# EAGLE board Schematic_EBook v22 (EAGLE 9.7.0)
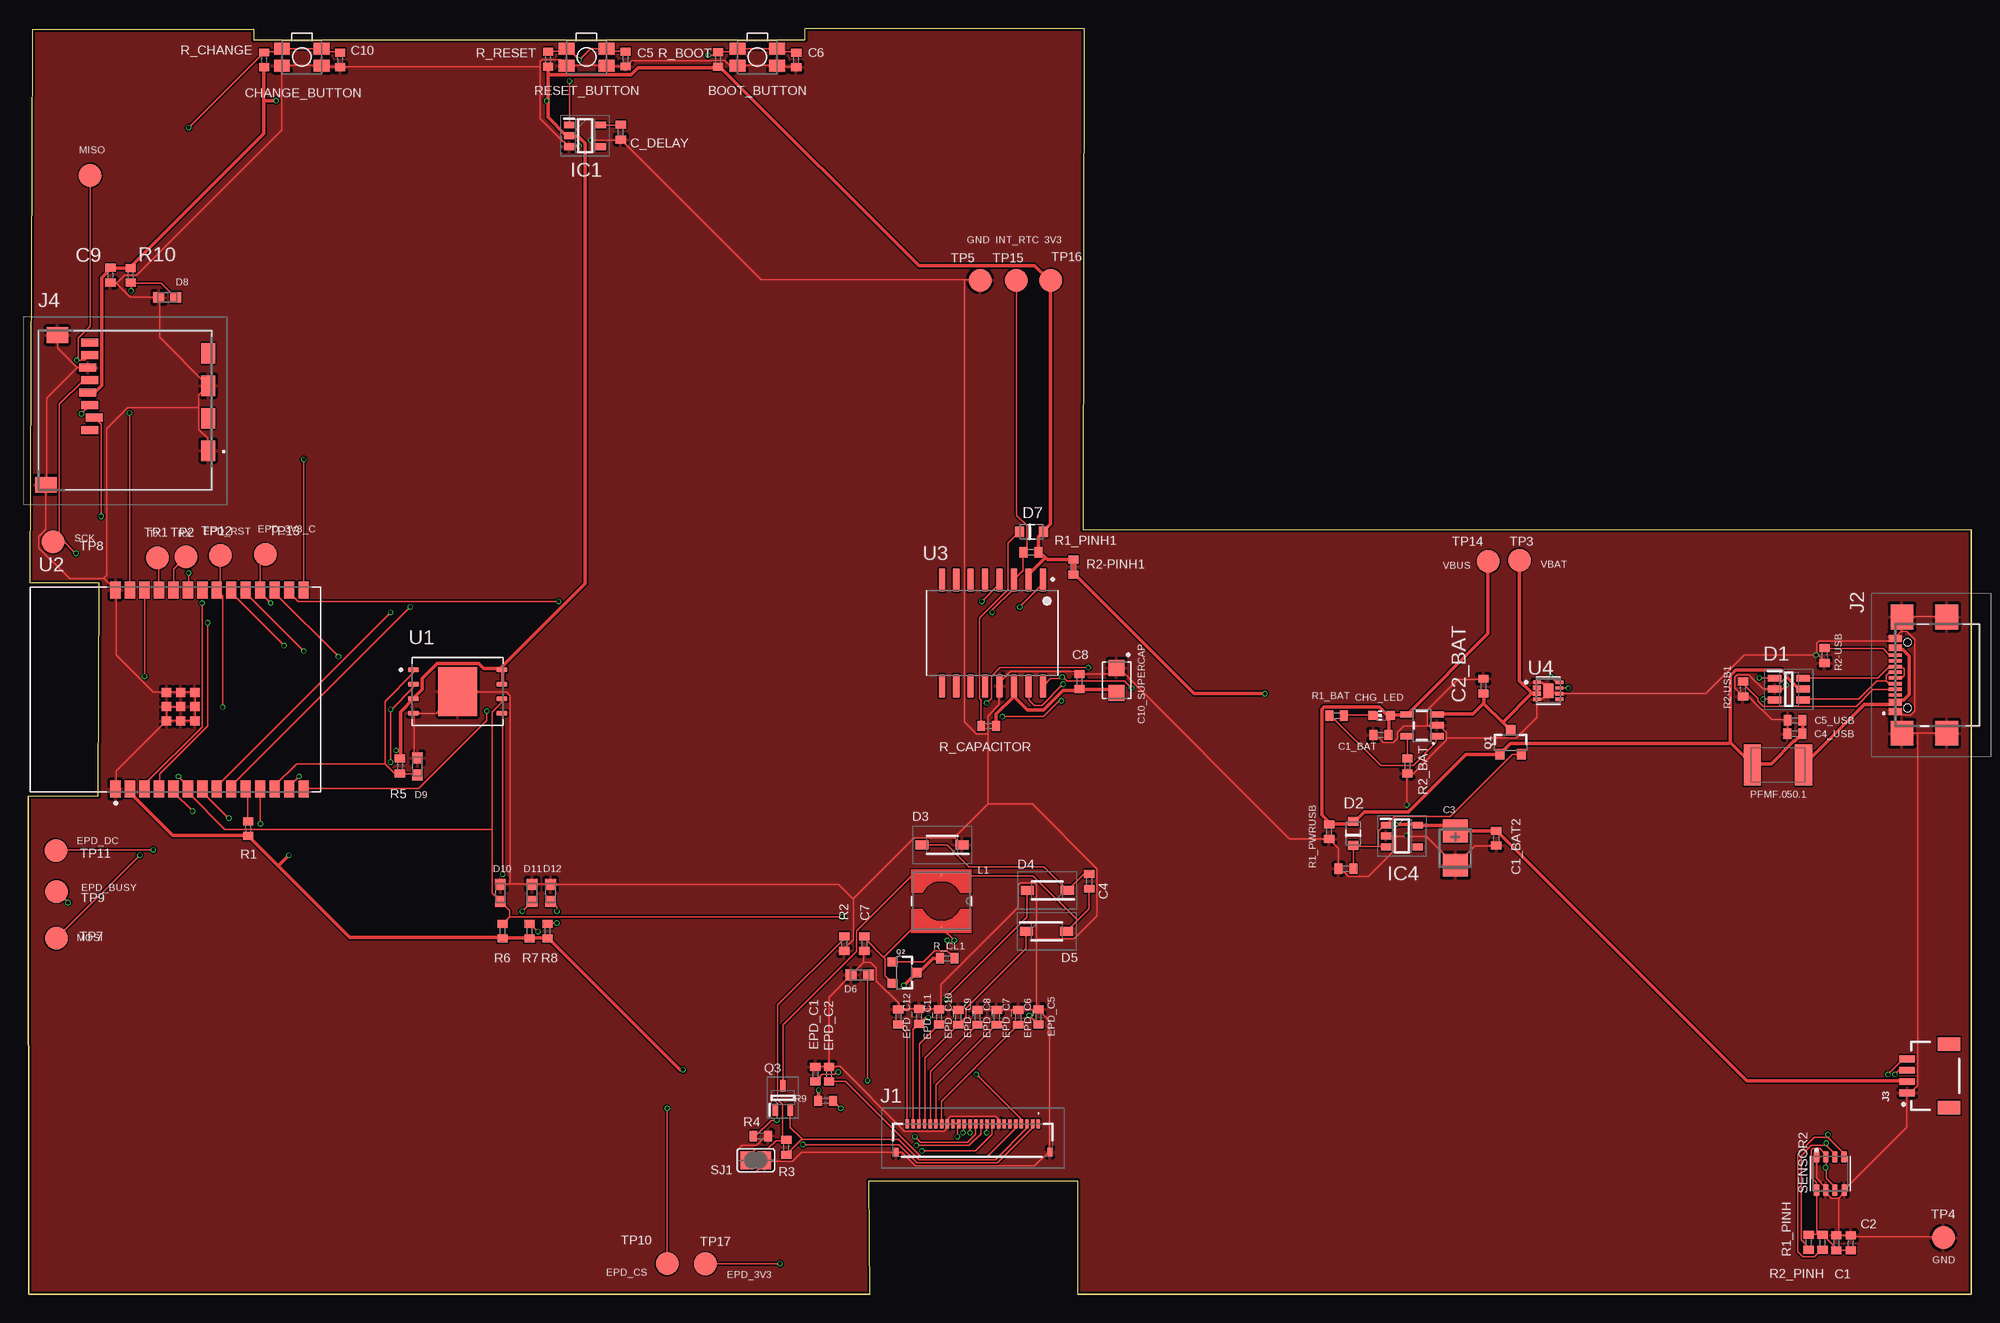
[diagram p0: board, top side]
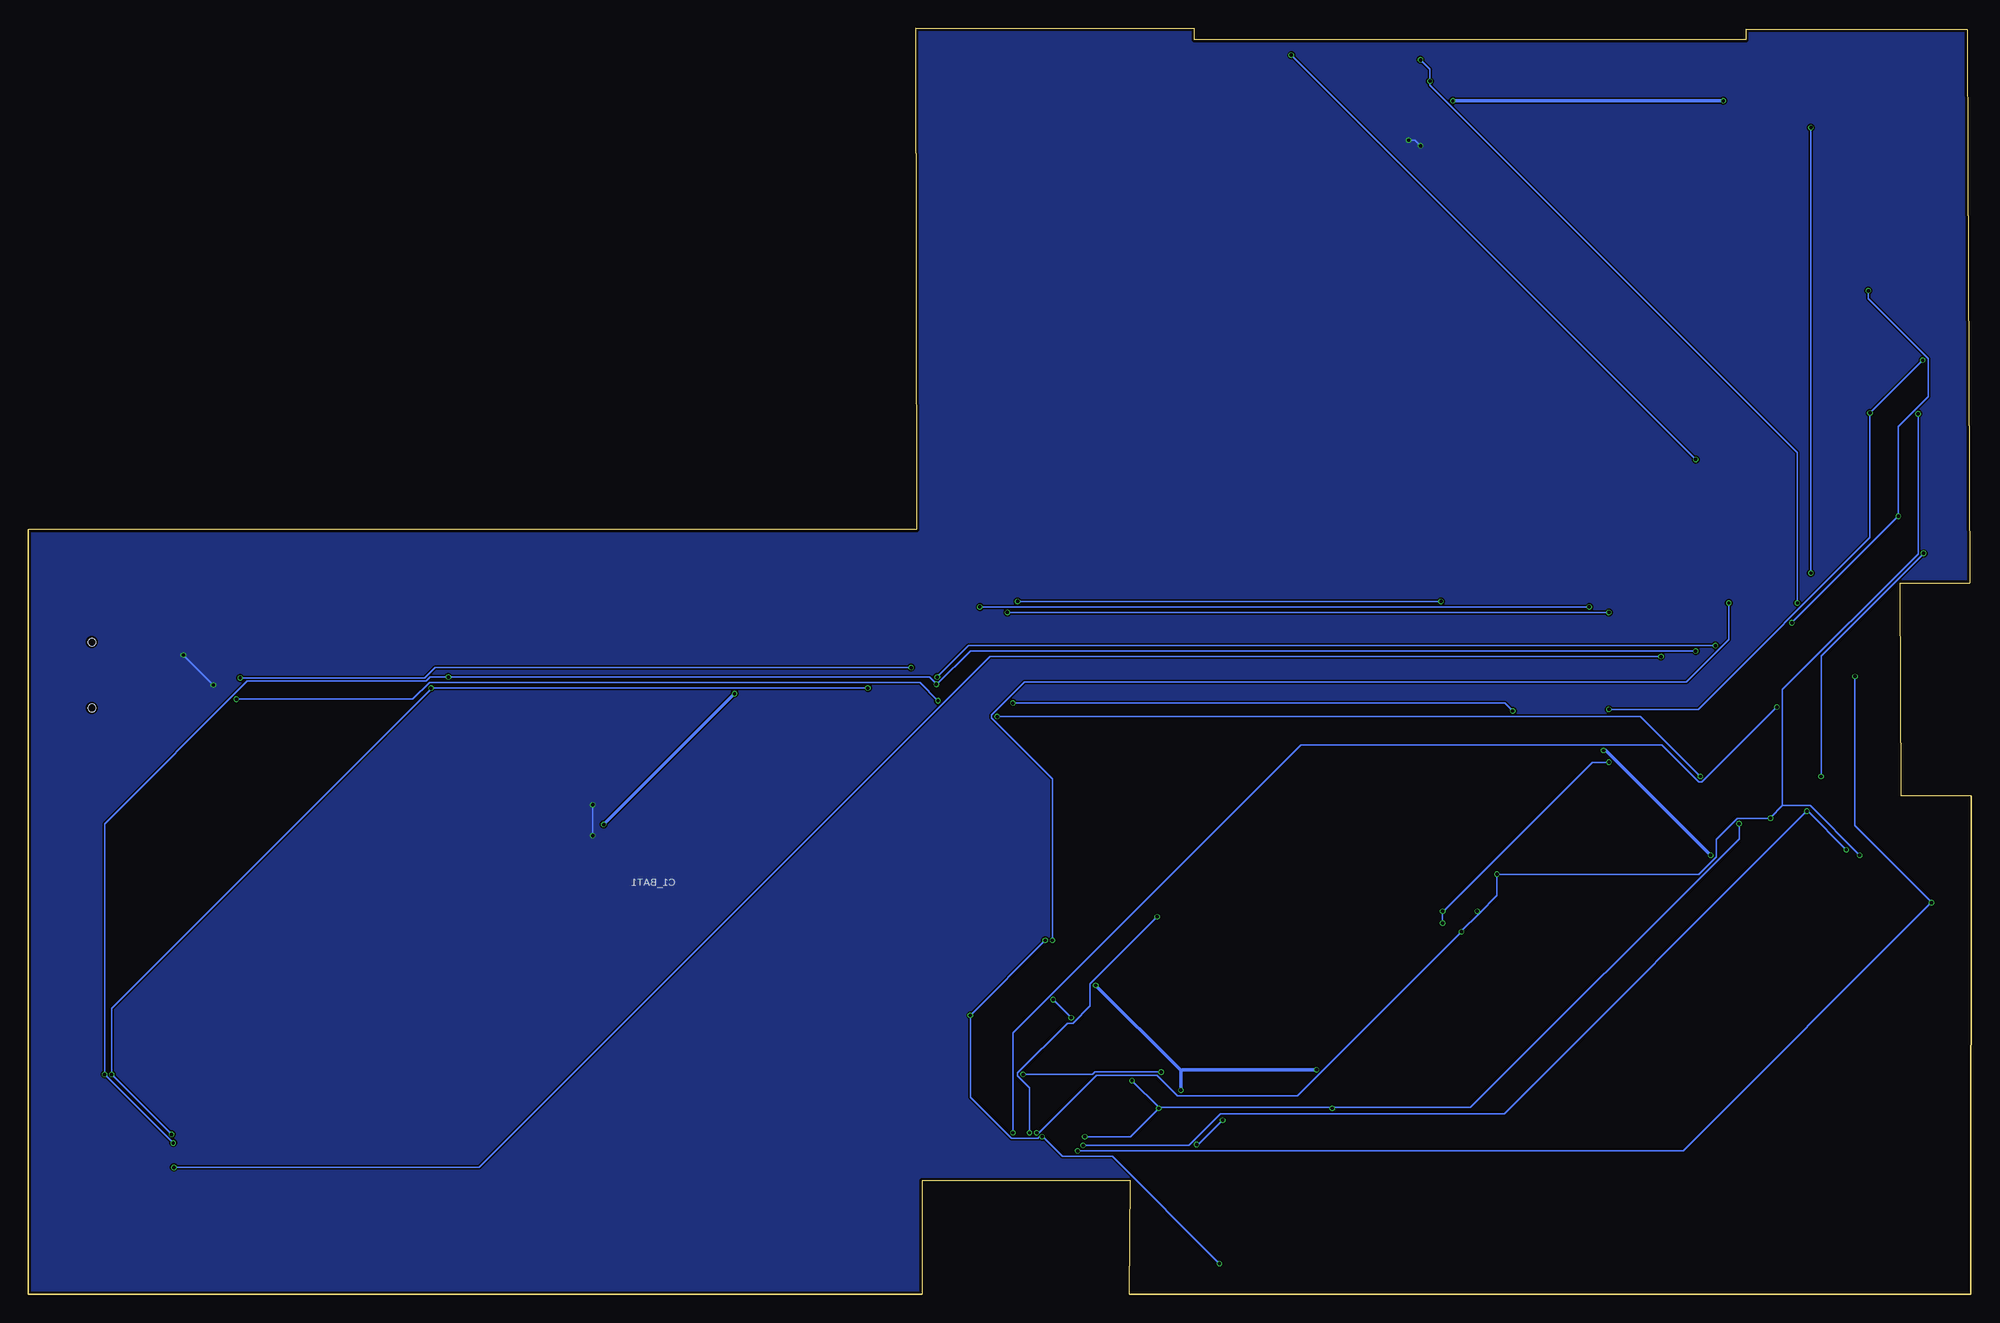
[diagram p1: board, bottom side, seen from below]

Size 170.61 x 111.2 mm. Coordinates in mm from the lower left corner, seen from the top.
Outline: 0.01,0 73.91,0
Outline: 92.11,0 170.61,0
Outline: 170.61,0 170.61,67.2
Outline: 92.71,111.2 68.21,111.17
Outline: 19.79,111.12 0.31,111.1
Outline: 0,43.8 0.01,0
Outline: 0.31,111.1 19.79,111.12
Outline: 68.21,111.17 92.71,111.2
Outline: 92.71,111.2 92.61,67.2 170.61,67.2
Outline: 170.61,67.2 170.61,0
Outline: 170.61,0 92.11,0
Outline: 73.91,0 0.01,0
Outline: 0.01,0 0,43.8
Outline: 73.91,0 73.81,10 92.01,10 92.11,10 92.11,0
Outline: 0,43.8 6.11,43.8 6.21,62.5 0.1,62.5 0.3,99.3 0.31,111.1
Outline: 19.79,111.12 19.79,110.2 68.21,110.2 68.21,111.17
Copper layers (1*16): Top 0.035mm / dielectric 1.6mm / Bottom 0.035mm
Design rules "jlcpcb-2layers.dru": minimum track width 0.15mm, minimum drill 0.3mm, track to track 5mil, track to pad 5mil, pad to pad 5mil, via to via 5mil, smd to smd 5mil, copper to edge 0.2mm, drill to drill 6mil, minimum pad ring 10mil, minimum via ring 3mil, stop-mask expansion 4mil, vias tented up to drill 0mil, thermal gap 10mil
Net classes: 2 Power: width 0.3 mm

## Footprints (pad centres in the part's own frame; a part is rotated, then mirrored left to right if it is on the bottom)
MYBUTTON = smd 1.4 x 1.05: 1 1.75,0.75; 2 -1.75,0.75; 3 -1.75,-0.75; 4 1.75,-0.75
EAGLE-LTSPICE_C0402 = smd 0.7 x 0.9: 1 -0.65,0; 2 0.65,0
RCL_CT3528 = smd 2 x 2.2: + -1.5,0; - 1.5,0
CAPCP3225X100N = smd 1.4 x 1.4: 1 -1.1,0; 2 1.1,0
ADAFRUIT_CHIP-LED0603 = smd 0.8 x 0.8: A 0,-0.75; C 0,0.75
SOT95P280X145-6N = smd 1.2 x 0.6: 1 -1.25,0.95; 2 -1.25,0; 3 -1.25,-0.95; 4 1.25,-0.95; 5 1.25,0; 6 1.25,0.95
ESP32_WROVER_AVX---SD0805S020S1R0_AVX_SD0805S020S1R0_0 = smd 0.8 x 0.9: 1 -1.05,0; 2 1.05,0
SOD3716X135N = smd 1.15 x 0.8: 1 -1.75,0; 2 1.75,0
DIOC1608X36N = smd 0.97 x 0.94: 1 -0.75,0; 2 0.75,0
SOT95P280X125-5N = smd 0.9 x 0.6: 1 -1.4,0.95; 2 -1.4,0; 3 -1.4,-0.95; 4 1.4,-0.95; 5 1.4,0.95
SOT95P280X120-5N = smd 0.9 x 0.6: 1 -1.4,0.95; 2 -1.4,0; 3 -1.4,-0.95; 4 1.4,-0.95; 5 1.4,0.95
FH34SRJ24S05SH99 = smd 0.3 x 0.8: 1 5.75,1.45; 2 5.25,1.45; 3 4.75,1.45; 4 4.25,1.45; 5 3.75,1.45; 6 3.25,1.45; 7 2.75,1.45; 8 2.25,1.45; 9 1.75,1.45; 10 1.25,1.45; 11 0.75,1.45; 12 0.25,1.45; 13 -0.25,1.45; 14 -0.75,1.45; 15 -1.25,1.45; 16 -1.75,1.45; 17 -2.25,1.45; 18 -2.75,1.45; 19 -3.25,1.45; 20 -3.75,1.45; 21 -4.25,1.45; 22 -4.75,1.45; 23 -5.25,1.45; 24 -5.75,1.45 | smd 0.4 x 0.8: MP1 6.75,-1.05; MP2 -6.75,-1.05
SAMACSYS_PARTS_USB4110GFA = smd 0.3 x 1.15: A1 -3.35,3.678; A4 -2.55,3.678; A5 -1.25,3.678; A6 -0.25,3.678; A7 0.25,3.678; A8 1.25,3.678; A9 2.55,3.678; A12 3.35,3.678; B1 3.05,3.678; B4 2.25,3.678; B5 1.75,3.678; B6 0.75,3.678; B7 -0.75,3.678; B8 -1.75,3.678; B9 -2.25,3.678; B12 -3.05,3.678 | smd 2.18 x 2: MP1 -5.11,-0.827; MP2 5.11,-0.827; MP3 -5.11,3.103; MP4 5.11,3.103 | hole 0.65: -2.89,2.603; 2.89,2.603
JST04_1MM_RA = smd 0.6 x 1.35: 1 -1.5,0; 2 -0.5,0; 3 0.5,0; 4 1.5,0 | smd 1.2 x 2: NC1 2.8,-3.675; NC2 -2.8,-3.675
112ATAARR03ATTEND = smd 1.8 x 1.2: G1 10.6,10.4; G2 4.9,10.4; S1 7.75,10.4; S2 2.05,10.4 | smd 1.4 x 1.9: G3 13.6,-3.85; G4 0.45,-2.85 | smd 0.7 x 1.5: P1 8.8,0; P2 7.7,0.4; P3 6.6,0; P4 5.5,-0.2; P5 4.4,0; P6 3.3,-0.2; P7 2.2,0; P8 1.1,0
IND_4828-WE-TPC_WRE = smd 0.127 x 0.127: 1 -2.286,0; 2 2.286,0
ESP32_WROVER_SPARKFUN-IC-POWER_SOT23-5 = smd 0.55 x 1.2: 1 -0.95,-1.3; 2 0,-1.3; 3 0.95,-1.3; 4 0.95,1.3; 5 -0.95,1.3
ESP32C6_VARISTOR_CT/CN1812 = smd 1.5 x 3.6: 1 -2.25,0; 2 2.25,0
ESP32_WROVER_SPARKFUN-DISCRETESEMI_SOT23-3 = smd 0.8 x 0.9: 1 -0.95,-1; 2 0.95,-1; 3 0,1.1
SOT65P210X110-3N = smd 1.05 x 0.5: 1 -1.05,0.65; 2 -1.05,-0.65; 3 1.05,0
ESP32_WROVER_EAGLE-LTSPICE_R0402 = smd 0.7 x 0.9: 1 -0.65,0; 2 0.65,0
ESP32_WROVER_BME680_PSON80P300X300X100-8N = smd 1.016 x 0.5: 1 1.458,1.2; 2 1.458,0.4; 3 1.458,-0.4; 4 1.458,-1.2; 5 -1.458,-1.22; 6 -1.458,-0.4; 7 -1.458,0.4; 8 -1.458,1.2
SJ = smd 1.168 x 1.6: 1 -0.762,0; 2 0.762,0
TP20R = smd 2 x 2: TP 0,0
SON127P600X800X80-9N = smd 0.94 x 0.44: 1 -3.895,1.905; 2 -3.895,0.635; 3 -3.895,-0.635; 4 -3.895,-1.905; 5 3.895,-1.905; 6 3.895,-0.635; 7 3.895,0.635; 8 3.895,1.905 | smd 3.4 x 4.3: 9 0,0
XCVR_ESP32-C6-WROOM-1-N8 = smd 1.5 x 0.9: 1 -8.75,5.26; 2 -8.75,3.99; 3 -8.75,2.72; 4 -8.75,1.45; 5 -8.75,0.18; 6 -8.75,-1.09; 7 -8.75,-2.36; 8 -8.75,-3.63; 9 -8.75,-4.9; 10 -8.75,-6.17; 11 -8.75,-7.44; 12 -8.75,-8.71; 13 -8.75,-9.98; 14 -8.75,-11.25; 15 8.75,-11.25; 16 8.75,-9.98; 17 8.75,-8.71; 18 8.75,-7.44; 19 8.75,-6.17; 20 8.75,-4.9; 21 8.75,-3.63; 22 8.75,-2.36; 23 8.75,-1.09; 24 8.75,0.18; 25 8.75,1.45; 26 8.75,2.72; 27 8.75,3.99; 28 8.75,5.26 | smd 0.8 x 0.8: 29_1 -2.755,0.79; 29_2 -1.505,0.79; 29_3 -0.255,0.79; 29_4 -2.755,-0.46; 29_5 -1.505,-0.46; 29_6 -0.255,-0.46; 29_7 -2.755,-1.71; 29_8 -1.505,-1.71; 29_9 -0.255,-1.71
SOIC127P1032X265-16N = smd 2.05 x 0.59: 1 -4.655,4.445; 2 -4.655,3.175; 3 -4.655,1.905; 4 -4.655,0.635; 5 -4.655,-0.635; 6 -4.655,-1.905; 7 -4.655,-3.175; 8 -4.655,-4.445; 9 4.655,-4.445; 10 4.655,-3.175; 11 4.655,-1.905; 12 4.655,-0.635; 13 4.655,0.635; 14 4.655,1.905; 15 4.655,3.175; 16 4.655,4.445
SON50P200X200X80-9N = smd 0.76 x 0.27: 1 -0.985,0.75; 4 -0.985,-0.75; 5 0.985,-0.75; 6 0.985,-0.25; 7 0.985,0.25; 8 0.985,0.75 | smd 0.813 x 0.406: 2 -0.985,0.25; 3 -0.985,-0.25 | smd 0.9 x 1.3: 9 0,0

## Placement (x,y rotation side)
BOOT_BUTTON  BUTTON_CUSYOMV1  [MYBUTTON]  64.01,108.69 180 top
C1  100nF  [EAGLE-LTSPICE_C0402]  158.77,4.53 90 top
C1_BAT  4.7uF  [EAGLE-LTSPICE_C0402]  118.77,49.15 180 top
C1_BAT1  4.7uF  [EAGLE-LTSPICE_C0402]  115.71,37.4 180 top
C1_BAT2  4.7uF  [EAGLE-LTSPICE_C0402]  128.9,40.07 270 top
C2  100nF  [EAGLE-LTSPICE_C0402]  160.05,4.53 90 top
C2_BAT  4.7uF  [EAGLE-LTSPICE_C0402]  127.79,53.43 90 top
C3  100uF TANT  [RCL_CT3528]  125.32,39.2 270 top
C4  4.7uF/25V  [EAGLE-LTSPICE_C0402]  93.16,36.29 270 top
C4_USB  100nF  [EAGLE-LTSPICE_C0402]  155.12,49.25 180 top
C5  1uF  [EAGLE-LTSPICE_C0402]  52.44,108.51 270 top
C5_USB  4.7uF  [EAGLE-LTSPICE_C0402]  155.15,50.43 180 top
C6  100nF  [EAGLE-LTSPICE_C0402]  67.43,108.43 270 top
C7  10uF  [EAGLE-LTSPICE_C0402]  73.41,30.81 270 top
C8  100nF  [EAGLE-LTSPICE_C0402]  92.31,53.83 90 top
C9  100nF  [EAGLE-LTSPICE_C0402]  7.19,89.52 270 top
C10  100nF  [EAGLE-LTSPICE_C0402]  27.37,108.43 270 top
C10_SUPERCAP  CPH3225A  [CAPCP3225X100N]  95.57,53.94 270 top
C_DELAY  100nF  [EAGLE-LTSPICE_C0402]  52.02,102.09 270 top
CHANGE_BUTTON  BUTTON_CUSYOMV1  [MYBUTTON]  24.01,108.69 180 top
CHG_LED  [ADAFRUIT_CHIP-LED0603]  118.85,50.85 90 top
D1  USBLC6-2SC6Y  [SOT95P280X145-6N]  154.61,53.17 0 top
D2  ESP32_WROVER_AVX---SD0805S020S1R0_AVX_SD0805S020S1R0_0_0AVX_SD0805S020S1R0_0_0  [ESP32_WROVER_AVX---SD0805S020S1R0_AVX_SD0805S020S1R0_0]  116.35,40.48 90 top
D3  MBR0530  [SOD3716X135N]  80.24,39.48 180 top
D4  MBR0530  [SOD3716X135N]  89.48,35.48 180 top
D5  MBR0530  [SOD3716X135N]  89.42,31.88 0 top
D6  PGB1010603MR  [DIOC1608X36N]  73.01,28.07 0 top
D7  ESP32_WROVER_AVX---SD0805S020S1R0_AVX_SD0805S020S1R0_0_0AVX_SD0805S020S1R0_0_0  [ESP32_WROVER_AVX---SD0805S020S1R0_AVX_SD0805S020S1R0_0]  88.1,66.98 0 top
D8  PGB1010603MR  [DIOC1608X36N]  12.19,87.57 0 top
D9  PGB1010603MR  [DIOC1608X36N]  34.17,46.37 270 top
D10  PGB1010603MR  [DIOC1608X36N]  41.45,35.27 270 top
D11  PGB1010603MR  [DIOC1608X36N]  44.23,35.27 270 top
D12  PGB1010603MR  [DIOC1608X36N]  45.86,35.28 270 top
EPD_C1  1uF/50V  [EAGLE-LTSPICE_C0402]  69.11,19.35 90 top
EPD_C2  1uF/50V  [EAGLE-LTSPICE_C0402]  70.32,19.35 90 top
EPD_C5  0.1uF/50V  [EAGLE-LTSPICE_C0402]  88.7,24.39 90 top
EPD_C6  1uF/50V  [EAGLE-LTSPICE_C0402]  86.93,24.35 90 top
EPD_C7  1uF/50V  [EAGLE-LTSPICE_C0402]  85.04,24.35 90 top
EPD_C8  1uF/50V  [EAGLE-LTSPICE_C0402]  83.35,24.35 90 top
EPD_C9  1uF/50V  [EAGLE-LTSPICE_C0402]  81.66,24.35 90 top
EPD_C10  1uF/50V  [EAGLE-LTSPICE_C0402]  79.96,24.39 90 top
EPD_C11  1uF/50V  [EAGLE-LTSPICE_C0402]  78.22,24.42 90 top
EPD_C12  1uF/50V  [EAGLE-LTSPICE_C0402]  76.4,24.39 90 top
IC1  BD5229G-TR  [SOT95P280X125-5N]  48.88,101.77 0 top
IC4  XC6220A331MR-G  [SOT95P280X120-5N]  120.62,40.27 0 top
J1  FH34SRJ-24S-0.5SH_99_  [FH34SRJ24S05SH99]  82.95,13.54 0 top
J2  SAMACSYS_PARTS_USB4110-GF-A  [SAMACSYS_PARTS_USB4110GFA]  167.65,54.4 90 top
J3  QWIIC_RIGHT_ANGLE  [JST04_1MM_RA]  165,19.2 90 top
J4  112A-TAAR-R03_ATTEND  [112ATAARR03ATTEND]  5.39,84.71 270 top
L1  68uH  [IND_4828-WE-TPC_WRE]  80.18,34.55 270 top
MCP73831  ESP32_WROVER_SPARKFUN-IC-POWER_MCP73831  [ESP32_WROVER_SPARKFUN-IC-POWER_SOT23-5]  122.39,49.99 90 top
PFMF.050.1  ESP32C6_VARISTORCN1812  [ESP32C6_VARISTOR_CT/CN1812]  153.65,46.5 180 top
Q1  20V/4.2A/52mΩ/1.4W  [ESP32_WROVER_SPARKFUN-DISCRETESEMI_SOT23-3]  130.17,48.46 0 top
Q2  20V/4.2A/52mΩ/1.4W  [ESP32_WROVER_SPARKFUN-DISCRETESEMI_SOT23-3]  76.89,28.26 270 top
Q3  SI1308EDL-T1-GE3  [SOT65P210X110-3N]  66.25,17.28 90 top
R1  10K  [ESP32_WROVER_EAGLE-LTSPICE_R0402]  19.29,40.91 90 top
R1_BAT  200  [ESP32_WROVER_EAGLE-LTSPICE_R0402]  114.9,50.83 0 top
R1_PINH  10K  [ESP32_WROVER_EAGLE-LTSPICE_R0402]  156.34,4.57 90 top
R1_PINH1  10K  [ESP32_WROVER_EAGLE-LTSPICE_R0402]  88.05,65.19 0 top
R1_PWRUSB  100K  [ESP32_WROVER_EAGLE-LTSPICE_R0402]  114.23,40.64 90 top
R2  2.2  [ESP32_WROVER_EAGLE-LTSPICE_R0402]  71.65,30.81 90 top
R2-PINH1  10K  [ESP32_WROVER_EAGLE-LTSPICE_R0402]  91.78,63.89 90 top
R2-USB  5k1  [ESP32_WROVER_EAGLE-LTSPICE_R0402]  157.75,56.13 270 top
R2-USB1  5k1  [ESP32_WROVER_EAGLE-LTSPICE_R0402]  150.58,53.17 90 top
R2_BAT  2K  [ESP32_WROVER_EAGLE-LTSPICE_R0402]  121.11,46.42 90 top
R2_PINH  10K  [ESP32_WROVER_EAGLE-LTSPICE_R0402]  157.56,4.57 90 top
R3  0.47  [ESP32_WROVER_EAGLE-LTSPICE_R0402]  66.55,12.92 90 top
R4  10K  [ESP32_WROVER_EAGLE-LTSPICE_R0402]  64.31,13.91 0 top
R5  10K  [ESP32_WROVER_EAGLE-LTSPICE_R0402]  32.63,46.41 90 top
R6  10K  [ESP32_WROVER_EAGLE-LTSPICE_R0402]  41.65,31.91 270 top
R7  10K  [ESP32_WROVER_EAGLE-LTSPICE_R0402]  44.01,31.91 270 top
R8  10K  [ESP32_WROVER_EAGLE-LTSPICE_R0402]  45.59,31.91 270 top
R9  10K  [ESP32_WROVER_EAGLE-LTSPICE_R0402]  70.01,17.01 180 top
R10  10K  [ESP32_WROVER_EAGLE-LTSPICE_R0402]  8.97,89.51 90 top
R_BOOT  10K  [ESP32_WROVER_EAGLE-LTSPICE_R0402]  60.57,108.47 90 top
R_CAPACITOR  15  [ESP32_WROVER_EAGLE-LTSPICE_R0402]  84.33,49.94 180 top
R_CHANGE  10K  [ESP32_WROVER_EAGLE-LTSPICE_R0402]  20.7,108.44 90 top
R_CL1  10K  [ESP32_WROVER_EAGLE-LTSPICE_R0402]  80.69,29.53 0 top
R_RESET  10K  [ESP32_WROVER_EAGLE-LTSPICE_R0402]  45.64,108.49 90 top
RESET_BUTTON  BUTTON_CUSYOMV1  [MYBUTTON]  49.01,108.69 180 top
SENSOR2  ESP32_WROVER_BME680_BME680  [ESP32_WROVER_BME680_PSON80P300X300X100-8N]  158.25,10.62 90 top
SJ1  [SJ]  63.87,11.79 180 top
TP1  TPTP20R  [TP20R]  11.32,64.69 0 top
TP2  TPTP20R  [TP20R]  13.85,64.78 0 top
TP3  TPTP20R  [TP20R]  130.96,64.49 0 top
TP4  TPTP20R  [TP20R]  168.18,4.99 0 top
TP5  TPTP20R  [TP20R]  83.57,89.09 0 top
TP6  TPTP20R  [TP20R]  5.42,98.29 0 top
TP7  TPTP20R  [TP20R]  2.44,31.29 0 top
TP8  TPTP20R  [TP20R]  2.16,66.09 0 top
TP9  TPTP20R  [TP20R]  2.48,35.39 0 top
TP10  TPTP20R  [TP20R]  56.1,2.71 0 top
TP11  TPTP20R  [TP20R]  2.4,38.99 0 top
TP12  TPTP20R  [TP20R]  16.85,64.91 0 top
TP13  TPTP20R  [TP20R]  20.8,65.01 0 top
TP14  TPTP20R  [TP20R]  128.2,64.39 0 top
TP15  TPTP20R  [TP20R]  86.75,89.09 0 top
TP16  TPTP20R  [TP20R]  89.8,89.09 0 top
TP17  TPTP20R  [TP20R]  59.45,2.69 0 top
U1  W25Q512JVEIQ  [SON127P600X800X80-9N]  37.7,52.96 0 top
U2  ESP32-C6-WROOM-1-N8  [XCVR_ESP32-C6-WROOM-1-N8]  12.91,53.14 90 top
U3  DS3231SN#  [SOIC127P1032X265-16N]  84.66,58.1 270 top
U4  MAX17048G+T10  [SON50P200X200X80-9N]  133.48,53.02 0 top

## Library data of the parts
BOOT_BUTTON CHANGE_BUTTON CHG_LED PFMF.050.1 RESET_BUTTON SJ1 TP1-TP17 = DeskAssistant v19 v1
C1 C1_BAT C1_BAT1 C1_BAT2 C2 C2_BAT C4 C4_USB C5 C5_USB C6-C10 C_DELAY EPD_C1 EPD_C2 EPD_C5-EPD_C12 = DeskAssistant v19 v1; SPICEMODEL: NONE; SPICEPREFIX: C
C3 = DeskAssistant v19 v1; SPICEPREFIX: C
C10_SUPERCAP = DeskAssistant v19 v1; AVAILABILITY: Not in stock; CHECK_PRICES: https://www.snapeda.com/parts/CPH3225A/Seiko+Instruments/view-part/?ref=eda; DESCRIPTION: 11 mF (EDLC) Supercapacitor 3.3 V 1210 (3225 Metric) - -; MF: Seiko Instruments; MP: CPH3225A; PACKAGE: 1210 Seiko; PRICE: None; PURCHASE-URL: https://www.snapeda.com/api/url_track_click_mouser/?unipart_id=562593&manufacturer=Seiko Instruments&part_name=CPH3225A&search_term=None; SNAPEDA_LINK: https://www.snapeda.com/parts/CPH3225A/Seiko+Instruments/view-part/?ref=snap
D1 = DeskAssistant v19 v1; AVAILABILITY: In Stock; CHECK_PRICES: https://www.snapeda.com/parts/USBLC6-2SC6Y/STMicroelectronics/view-part/?ref=eda; DESCRIPTION: 17V Clamp 5A (8/20µs) Ipp Tvs Diode Surface Mount SOT-23-6; MF: STMicroelectronics; MP: USBLC6-2SC6Y; PACKAGE: SOT-23-6 STMicroelectronics; PRICE: None; SNAPEDA_LINK: https://www.snapeda.com/parts/USBLC6-2SC6Y/STMicroelectronics/view-part/?ref=snap
D2 D7 = DeskAssistant v19 v1; CENTROID_NOT_SPECIFIED: No; DATASHEET: http://datasheets.avx.com/schottky.pdf; DIGIKEY_DESCRIPTION: DIODE SCHOTTKY 20V 1A 0805; DIGIKEY_PART_NUMBER: 478-7800-1-ND; LEAD_FREE: yes; MF: AVX; MOUSER_PART_NUMBER: 581-SD0805S020S1R0; PACKAGE: 0805 (2012 metric); PREFIX: D; ROHS: yes; TEMPERATURE_RANGE_HIGH: +125°C; TEMPERATURE_RANGE_LOW: -55°C
D3-D5 = DeskAssistant v19 v1; AVAILABILITY: In Stock; CHECK_PRICES: https://www.snapeda.com/parts/MBR0530/Onsemi/view-part/?ref=eda; DESCRIPTION: Diode Schottky 30 V 500mA Surface Mount SOD-123; MF: ON Semiconductor; MP: MBR0530; PACKAGE: SOD-123-2 ON Semiconductor; PRICE: None; PURCHASE-URL: https://www.snapeda.com/api/url_track_click_mouser/?unipart_id=179458&manufacturer=ON Semiconductor&part_name=MBR0530&search_term=None; SNAPEDA_LINK: https://www.snapeda.com/parts/MBR0530/Onsemi/view-part/?ref=snap
D6 D8-D12 = DeskAssistant v19 v1; AVAILABILITY: In Stock; CHECK_PRICES: https://www.snapeda.com/parts/PGB1010603MR/Littelfuse/view-part/?ref=eda; DESCRIPTION: 150V (Typ) Clamp - Ipp Tvs Diode Surface Mount 0603 (1608 Metric); MF: Littelfuse Inc.; MP: PGB1010603MR; PACKAGE: 0603 Littelfuse Inc.; PRICE: None; PURCHASE-URL: https://www.snapeda.com/api/url_track_click_mouser/?unipart_id=5659453&manufacturer=Littelfuse Inc.&part_name=PGB1010603MR&search_term=None; SNAPEDA_LINK: https://www.snapeda.com/parts/PGB1010603MR/Littelfuse/view-part/?ref=snap
IC1 = DeskAssistant v19 v1; DESCRIPTION: Voltage Detector with Adjustable Delay Time: CMOS processes are utilized to develop high precision, low current consumption CMOS reset ICs that allow arbitrary setting of the delay time. The extensive lineup includes both Nch Open Drain and CMOS output types in a wide range of detection voltages (from 2.3V to 6.0V, in 0.1V steps), enabling selection of the ideal solution based on customer requirements. In addition, the entire series is of course both lead-free and RoHS-compliant.; HEIGHT: 1.25mm; MANUFACTURER_NAME: ROHM Semiconductor; MANUFACTURER_PART_NUMBER: BD5229G-TR; MOUSER_PART_NUMBER: 755-BD5229G-TR; MOUSER_PRICE-STOCK: https://www.mouser.co.uk/ProductDetail/ROHM-Semiconductor/BD5229G-TR?qs=4kLU8WoGk0vvnhrrYwdszw%3D%3D
IC4 = DeskAssistant v19 v1; DESCRIPTION: LDO Voltage Regulators; HEIGHT: 1.2mm; MANUFACTURER_NAME: Torex; MANUFACTURER_PART_NUMBER: XC6220A331MR-G; MOUSER_PART_NUMBER: 865-XC6220A331MR-G; MOUSER_PRICE-STOCK: https://www.mouser.co.uk/ProductDetail/Torex-Semiconductor/XC6220A331MR-G?qs=AsjdqWjXhJ8ZSWznL1J0gg%3D%3D
J1 = DeskAssistant v19 v1; DESCRIPTION: 24 Position FFC, FPC Connector Contacts, Top and Bottom 0.020" (0.50mm) Surface Mount, Right Angle; HEIGHT: 1.1mm; MANUFACTURER_NAME: Hirose; MANUFACTURER_PART_NUMBER: FH34SRJ-24S-0.5SH(99); MOUSER_PART_NUMBER: 798-FH34SRJ24S05SH99; MOUSER_PRICE-STOCK: https://www.mouser.co.uk/ProductDetail/Hirose-Connector/FH34SRJ-24S-0.5SH99?qs=vcbW%252B4%252BSTIpKBl5ap9J8Fw%3D%3D
J2 = DeskAssistant v19 v1; DESCRIPTION: CONN USB 2.0 TYPE-C R/A SMT; HEIGHT: 3.26mm; MANUFACTURER_NAME: GCT (GLOBAL CONNECTOR TECHNOLOGY); MANUFACTURER_PART_NUMBER: USB4110-GF-A; MOUSER_PART_NUMBER: 640-USB4110-GF-A; MOUSER_PRICE-STOCK: https://www.mouser.co.uk/ProductDetail/GCT/USB4110-GF-A?qs=KUoIvG%2F9IlYiZvIXQjyJeA%3D%3D
J3 = DeskAssistant v19 v1; PROD_ID: CONN-13694
J4 = DeskAssistant v19 v1; DESCRIPTION: Micro SD Card Socket, Push-Push Type, Top Mount, SMT, H=1.83mm, 10u; HEIGHT: 1.9mm; MANUFACTURER_NAME: ATTEND; MANUFACTURER_PART_NUMBER: 112A-TAAR-R03 ATTEND
L1 = DeskAssistant v19 v1; COPYRIGHT: Copyright (C) 2024 Ultra Librarian. All rights reserved.; MANUFACTURER_PART_NUMBER: 744043680; MFR_NAME: Wurth Electronics
MCP73831 = DeskAssistant v19 v1; PROD_ID: IC-09995
Q1 Q2 = DeskAssistant v19 v1; PROD_ID: TRAN-14388
Q3 = DeskAssistant v19 v1; AVAILABILITY: In Stock; CHECK_PRICES: https://www.snapeda.com/parts/SI1308EDL-T1-GE3/Vishay+Siliconix/view-part/?ref=eda; DESCRIPTION: Si1308EDL-T1-GE3 N-channel MOSFET Transistor, 1.5 A, 30 V, 3-Pin SC-70 | Siliconix / Vishay SI1308EDL-T1-GE3; MF: Vishay Siliconix; MP: SI1308EDL-T1-GE3; PACKAGE: SOT-323 Vishay Semiconductor; PRICE: None; PURCHASE-URL: https://www.snapeda.com/api/url_track_click_mouser/?unipart_id=274603&manufacturer=Vishay Siliconix&part_name=SI1308EDL-T1-GE3&search_term=None; SNAPEDA_LINK: https://www.snapeda.com/parts/SI1308EDL-T1-GE3/Vishay+Siliconix/view-part/?ref=snap
R1 R1_BAT R1_PINH R1_PINH1 R1_PWRUSB R2 R2-PINH1 R2-USB R2-USB1 R2_BAT R2_PINH R3-R10 R_BOOT R_CAPACITOR R_CHANGE R_CL1 R_RESET = DeskAssistant v19 v1; SPICEMODEL: NONE; SPICEPREFIX: R
SENSOR2 = DeskAssistant v19 v1; AVAILABILITY: Unavailable; DESCRIPTION: Integrated Environmental Unit; MF: Bosch Sensortec; MP: BME680; PACKAGE: LGA-8 Bosch Tools; PRICE: None
U1 = DeskAssistant v19 v1; AVAILABILITY: In Stock; CHECK_PRICES: https://www.snapeda.com/parts/W25Q512JVEIQ/Winbond+Electronics/view-part/?ref=eda; DESCRIPTION: FLASH - NOR Memory IC 512Mb (64M x 8) SPI - Quad I/O 133 MHz 8-WSON (8x6); MF: Winbond Electronics; MP: W25Q512JVEIQ; PACKAGE: Package; PRICE: None; SNAPEDA_LINK: https://www.snapeda.com/parts/W25Q512JVEIQ/Winbond+Electronics/view-part/?ref=snap
U2 = DeskAssistant v19 v1; AVAILABILITY: In Stock; CHECK_PRICES: https://www.snapeda.com/parts/ESP32-C6-WROOM-1-N8/Espressif+Systems/view-part/?ref=eda; DESCRIPTION: Multiprotocol Modules ESP32-C6 module, Wi-Fi 6 in 2.4 GHz band, Bluetooth 5, Zigbee 3.0 and Thread. ESP34-WROOM Compatible - ENGINEERING SAMPLE; MF: Espressif Systems; MP: ESP32-C6-WROOM-1-N8; PACKAGE: None; PRICE: None; SNAPEDA_LINK: https://www.snapeda.com/parts/ESP32-C6-WROOM-1-N8/Espressif+Systems/view-part/?ref=snap
U3 = DeskAssistant v19 v1; AVAILABILITY: In Stock; CHECK_PRICES: https://www.snapeda.com/parts/DS3231SN%23/Analog+Devices/view-part/?ref=eda; DESCRIPTION: Extremely Accurate I²C-Integrated RTC/TCXO/Crystal; MF: Analog Devices; MP: DS3231SN#; PACKAGE: SOIC-16 Maxim; PRICE: None; PURCHASE-URL: https://www.snapeda.com/api/url_track_click_mouser/?unipart_id=99048&manufacturer=Analog Devices&part_name=DS3231SN#&search_term=None; SNAPEDA_LINK: https://www.snapeda.com/parts/DS3231SN%23/Analog+Devices/view-part/?ref=snap
U4 = DeskAssistant v19 v1; AVAILABILITY: In Stock; CHECK_PRICES: https://www.snapeda.com/parts/MAX17048G+T10/Analog+Devices/view-part/?ref=eda; DESCRIPTION: 3µA 1-Cell/2-Cell Fuel Gauge with ModelGauge; MF: Analog Devices; MP: MAX17048G+T10; PACKAGE: TDFN-8 Maxim; PRICE: None; PURCHASE-URL: https://www.snapeda.com/api/url_track_click_mouser/?unipart_id=329239&manufacturer=Analog Devices&part_name=MAX17048G+T10&search_term=None; SNAPEDA_LINK: https://www.snapeda.com/parts/MAX17048G+T10/Analog+Devices/view-part/?ref=snap

## Nets
3V3 [Power]: C1_BAT2.1 C3.+ C9.1 D7.2 IC1.2 IC4.5 J3.2 J4.P4 Q2.3 R1.1 R1_PINH1.2 R2-PINH1.1 R2-PINH1.2 R5.2 R6.2 R7.2 R8.2 R9.2 R10.2 R_BOOT.1 R_CHANGE.1 R_CL1.1 R_RESET.1 TP16.TP U1.3 U1.7 U1.8 U2.2 U3.2
32KHZ: U2.9 U3.1
DN: D1.4 J2.A7 J2.B7
DP: D1.6 J2.A6 J2.B6
EPD_3V3: C7.1 EPD_C5.1 J1.15 J1.16 L1.2 Q2.2 TP17.TP
EPD_3V3_C: Q2.1 R_CL1.2 TP13.TP U2.18
EPD_BUSY: J1.9 TP9.TP U2.26
EPD_CS: D6.2 J1.12 R9.1 TP10.TP U2.11
EPD_DC: J1.11 TP11.TP U2.5
EPD_RST: J1.10 TP12.TP U2.21
FLASH_CS: D9.2 R5.1 U1.1 U2.12
GDR: J1.2 Q3.1 R4.1
GND: BOOT_BUTTON.1 BOOT_BUTTON.2 C1.2 C1_BAT1.2 C1_BAT2.2 C1_BAT.2 C2.2 C2_BAT.2 C3.- C4_USB.2 C5.2 C5_USB.2 C6.2 C7.2 C8.2 C9.2 C10.2 C10_SUPERCAP.1 C_DELAY.2 CHANGE_BUTTON.1 CHANGE_BUTTON.2 D1.2 D3.1 D6.1 D8.1 D9.1 D10.1 D11.1 D12.1 EPD_C1.2 EPD_C2.2 EPD_C5.2 EPD_C6.2 EPD_C7.2 EPD_C8.2 EPD_C9.2 EPD_C10.2 EPD_C11.2 EPD_C12.2 IC1.3 IC4.2 J1.8 J1.17 J1.MP1 J1.MP2 J2.A1 J2.A12 J2.B1 J2.B12 J2.MP1 J2.MP2 J2.MP3 J2.MP4 J3.1 J4.G1 J4.G2 J4.G3 J4.G4 J4.P6 MCP73831.2 R1_PWRUSB.1 R2-USB1.1 R2-USB.2 R2.1 R2_BAT.1 R4.2 RESET_BUTTON.1 RESET_BUTTON.2 SENSOR2.1 SENSOR2.5 SENSOR2.7 SJ1.1 TP4.TP TP5.TP U1.4 U1.9 U2.1 U2.28 U2.29_1 U2.29_2 U2.29_3 U2.29_4 U2.29_5 U2.29_6 U2.29_7 U2.29_8 U2.29_9 U3.13 U4.1 U4.4 U4.6 U4.9
GPIO8: R1.2 U2.10
I2C_PW: C1.1 C2.1 R1_PINH.2 R2_PINH.2 SENSOR2.2 SENSOR2.6 SENSOR2.8 U2.17
INT_RTC: R1_PINH1.1 TP15.TP U2.8 U3.3
IO/BOOT: BOOT_BUTTON.3 BOOT_BUTTON.4 C6.1 R_BOOT.2 U2.15
IO/CHANGE: C10.1 CHANGE_BUTTON.3 CHANGE_BUTTON.4 R_CHANGE.2 U2.23
MISO: D12.2 J4.P7 R8.1 TP6.TP U1.2 U2.27
MOSI: D11.2 J1.14 J4.P3 R7.1 TP7.TP U1.5 U2.7
N$1: J2.A5 R2-USB1.2
N$2: J2.B5 R2-USB.1
N$3: C1_BAT1.1 D2.1 IC4.1 IC4.3 Q1.2
N$5: MCP73831.1 R1_BAT.1
N$6: C4.1 D3.2 D4.1
N$7: CHG_LED.C R1_BAT.2
N$8: MCP73831.5 R2_BAT.2
N$10: EPD_C2.1 J1.5
N$11: EPD_C1.1 J1.4
N$12: C_DELAY.1 IC1.5
N$14: D7.1 R_CAPACITOR.2
N$20: EPD_C12.1 J1.24
N$22: EPD_C10.1 J1.22
N$23: EPD_C8.1 J1.20
N$25: EPD_C6.1 J1.18
N$26: EPD_C7.1 J1.19
PREVGH: D5.1 EPD_C9.1 J1.21
PREVGL: D4.2 EPD_C11.1 J1.23
RESE: J1.3 Q3.2 R3.1
RESE': R2.2 R3.2 SJ1.2
RESET: C5.1 IC1.1 R_RESET.2 RESET_BUTTON.3 RESET_BUTTON.4 U2.3
RTC_RST: U2.16 U3.4
RX: TP2.TP U2.24
SCK: D10.2 J1.13 J4.P5 R6.1 TP8.TP U1.6 U2.6
SCL: J3.4 R2_PINH.1 SENSOR2.4 U2.20 U3.16 U4.7
SDA: J3.3 R1_PINH.1 SENSOR2.3 U2.19 U3.15 U4.8
SRC: C4.2 D5.2 L1.1 Q3.3
SS_SD: D8.2 J4.P2 R10.1 U2.4
TX: TP1.TP U2.25
USB_D+: D1.1 U2.14
USB_D-: D1.3 U2.13
VBAT [Power]: C2_BAT.1 MCP73831.3 Q1.3 TP3.TP U4.2 U4.3
VBUS [Power]: C1_BAT.1 C4_USB.1 C5_USB.1 CHG_LED.A D1.5 D2.2 MCP73831.4 PFMF.050.1.2 Q1.1 R1_PWRUSB.2 TP14.TP
VRTC [Power]: C8.1 C10_SUPERCAP.2 R_CAPACITOR.1 U3.14
VUSB [Power]: J2.A4 J2.A9 J2.B4 J2.B9 PFMF.050.1.1

## Tracks (layer width: path | path; a pad name or v marks a point on that pad's centre or on a via)
3V3  (via drill 0.3)
  Top 0.3: v69.4,17.94 69.4,17.04 R9.2 | v76.88,27.15 Q2.3 78.13,28.18 79.44,29.5 80,29.5 R_CL1.1 | U1.7 41.63,53.6 41.63,54.85 U1.8 41.49,54.98 | 32.7,47.78 32.7,51.18 33.81,52.28 U1.3 33.87,52.42 34.57,53.12 34.57,54.08 35.88,55.4 39.55,55.4 39.97,54.98 41.49,54.98 | 32.7,47.78 32.7,47.09 R5.2 | U2.2 8.94,44.39 8.94,44.04 12.68,40.3 19.26,40.3 R1.1 19.4,40.16 21.93,37.64 | 21.93,37.64 28.2,31.37 41.56,31.37 R6.2 41.7,31.3 43.99,31.3 R7.2 44.12,31.3 45.58,31.3 R8.2 45.72,31.23 57.21,19.74 v57.49,19.74 | v32.28,47.78 32.56,47.78 32.7,47.78 | v22.86,38.57 22.03,37.74 21.93,37.64 | J3.2 164.96,18.77 150.91,18.77 129.02,40.65 C1_BAT2.1 128.89,40.72 125.42,40.72 C3.+ 125.28,40.72 124.8,41.2 122.03,41.2 IC4.5 121.89,41.27 v120.09,41.27 | 20.65,104.84 20.65,101.94 9.01,90.3 R10.2 8.94,90.16 7.21,90.16 C9.1 7.14,90.03 6.45,89.33 6.45,79.84 5.83,79.22 5.21,79.22 J4.P4 | 20.65,104.84 20.65,107.75 R_CHANGE.1 | 45.65,107.13 45.65,107.82 R_RESET.1 | 45.65,107.13 45.65,104.84 | 45.65,104.84 45.65,103.39 47.24,101.8 47.45,101.8 IC1.2 47.59,101.73 48.28,101.73 48.9,101.11 48.9,62.46 41.56,55.12 41.49,54.98 | 45.65,107.13 45.79,107.13 52.92,107.13 53.54,107.75 60.54,107.75 R_BOOT.1 60.67,107.68 60.88,107.68 78.19,90.37 88.37,90.37 89.62,89.12 TP16.TP 89.76,89.06 89.76,67.66 89.21,67.1 D7.2 89.14,66.97 88.72,66.55 88.72,65.23 R1_PINH1.2 88.86,65.16 89.31,64.71 | 89.31,64.71 89.48,64.54 91.63,64.54 R2-PINH1.2 91.77,64.47 91.77,63.29 R2-PINH1.1 91.91,63.23 102.36,52.77 v108.6,52.77 | U3.2 87.89,62.81 87.89,63.29 89.21,64.61 89.31,64.71 | v21.76,104.84 20.79,104.84 20.65,104.84
  Top 0.3: v45.51,104.84 45.65,104.84
  Bottom 0.3: 69.4,19.67 v69.4,17.94 | v76.88,27.15 69.4,19.67 | v32.28,47.78 32.07,47.78 v22.86,38.57 | v57.49,19.74 69.26,19.74 69.4,19.67 | v45.51,104.84 v21.76,104.84 | v108.6,52.77 v120.09,41.27
32KHZ  (via drill 0.3)
  Top 0.15: v33.53,60.39 17.88,44.74 17.88,44.46 U2.9 | v87.06,60.39 89.07,62.39 89.07,62.74 U3.1
  Bottom 0.15: v87.06,60.39 v33.53,60.39
DN
  Top 0.15: 163.16,53.88 163.37,53.67 163.93,53.67 J2.B7 | 163.16,53.88 163.16,54.36 163.44,54.64 163.93,54.64 J2.A7 | D1.4 155.89,52.28 160.74,52.28 162.33,53.88 163.1,53.88 163.16,53.88
DP
  Top 0.15: J2.A6 164,54.15 164.55,54.15 164.76,54.36 164.76,54.91 164.55,55.12 164,55.12 J2.B6 163.93,55.12 163.37,55.12 162.4,54.15 155.89,54.15 D1.6
EPD_3V3  (via drill 0.3)
  Top 0.15: 75.11,29.6 75.22,29.5 75.22,27.98 75.84,27.35 Q2.2 | 75.11,29.6 73.42,31.3 73.42,31.44 C7.1 | J1.16 81.24,15.03 81.66,15.03 J1.15 81.59,14.96 v81.59,13.85 | v87.89,24.52 88.65,23.75 EPD_C5.1 | v81.31,31.09 80.2,32.2 L1.2 80.13,32.2 77.71,32.2 75.15,29.64 75.11,29.6 | v66.01,2.7 59.5,2.7 TP17.TP
  Bottom 0.15: v81.31,31.09 v87.89,24.52 87.89,24.45 87.89,17.31 84.29,13.71 81.93,13.71 81.8,13.85 v81.59,13.85 81.52,13.85 79.79,12.12 75.42,12.12 v66.01,2.7
EPD_3V3_C  (via drill 0.3)
  Top 0.15: 80.69,30.19 79.58,30.19 78.61,29.22 75.91,29.22 Q2.1 | 80.69,30.19 81.31,29.57 R_CL1.2 | TP13.TP 20.79,64.96 20.37,64.54 20.37,61.91 U2.18 20.37,61.84 20.37,61.63 v21.27,60.73 | v80.69,31.09 80.69,30.26 80.69,30.19
  Bottom 0.15: v80.69,31.09 80.69,45.29 86.02,50.62 86.02,50.9 83.11,53.81 25.01,53.81 21.27,57.55 v21.27,60.73
EPD_BUSY  (via drill 0.3)
  Top 0.15: v78.47,12.6 83.18,12.6 84.64,14.06 84.64,14.96 J1.9 | v3.47,34.42 2.5,35.39 TP9.TP | v10.19,54.29 10.19,61.84 U2.26
  Bottom 0.15: v78.47,12.6 25.29,12.6 v3.47,34.42 3.47,34.49 10.19,41.2 v10.19,54.29
EPD_CS  (via drill 0.3)
  Top 0.15: v77.85,13.85 78.33,13.37 82.49,13.37 83.18,14.06 83.18,14.96 J1.12 | v71.34,16.34 70.72,16.97 R9.1 | v73.69,18.77 73.69,28.05 D6.2 | v20.37,41.34 20.37,44.39 U2.11 | v56.1,16.34 56.1,2.77 TP10.TP
  Bottom 0.15: v77.85,13.85 73.83,13.85 v71.34,16.34 | v73.69,18.77 71.34,16.41 v71.34,16.34 | v20.37,41.34 20.37,40.03 43.99,16.41 56.1,16.41 | 56.1,16.41 71.27,16.41 v71.34,16.34 | v56.1,16.34 56.1,16.41
EPD_DC  (via drill 0.3)
  Top 0.15: v77.99,13.09 82.63,13.09 83.67,14.13 83.67,14.96 J1.11 | v14.42,42.45 12.75,44.11 12.75,44.39 U2.5 | v10.95,39.06 2.44,39.06 TP11.TP
  Bottom 0.15: v77.99,13.09 68.71,13.09 65.94,15.86 41.01,15.86 v14.42,42.45 14.35,42.45 v10.95,39.06
EPD_RST  (via drill 0.3)
  Top 0.15: v84.15,14.2 84.15,14.96 J1.10 | v17.05,51.59 17.05,61.35 16.56,61.84 U2.21 16.56,61.91 16.84,62.19 16.84,64.89 TP12.TP
  Bottom 0.15: v84.15,14.2 84.15,22.99 58.87,48.27 27.16,48.27 23.9,45.01 23.63,45.01 v17.05,51.59
FLASH_CS
  Top 0.15: D9.2 34.15,45.64 34.08,45.7 32.7,45.7 R5.1 32.56,45.77 32.14,45.77 31.31,46.6 | 31.31,46.6 31.31,52.08 33.81,54.57 33.81,54.85 U1.1 | U2.12 21.69,44.46 21.69,44.74 23.56,46.6 31.24,46.6 31.31,46.6
GDR  (via drill 0.3)
  Top 0.15: v68.02,13.16 76.46,13.16 78.06,11.56 85.12,11.56 88.17,14.61 88.17,14.96 J1.2 | Q3.1 65.66,16.2 65.73,16.14 v65.73,15.3 65.66,15.3 65.25,15.3 63.86,13.92 63.72,13.92 R4.1
  Bottom 0.15: v68.02,13.16 67.88,13.16 v65.73,15.3
GND  (via drill 0.3)
  Top 0.15: 7.7,88.85 7.21,88.85 C9.2 | 7.7,88.85 8.94,87.6 11.44,87.6 D8.1 11.51,87.53 11.51,84.07 15.73,79.84 J4.G2 15.73,79.78 14.97,79.01 14.97,77.91 | 14.97,77.91 14.97,75.97 15.73,75.21 15.73,74.17 J4.G1 | 4.24,81.44 5.14,81.44 J4.P6 | 4.24,81.44 2.57,83.1 2.57,84.21 J4.G4 | 4.24,81.44 4.24,81.37 1.6,78.74 1.6,71.12 J4.G3 1.54,71.05 1.54,67.17 0.91,66.55 0.91,65.58 3.61,62.88 6.66,62.88 | U2.29_1 12.13,50.41 12.13,51.59 U2.29_2 12.2,51.59 13.31,51.59 U2.29_5 | U2.29_1 12.2,50.41 13.31,50.41 U2.29_4 13.38,50.41 14.55,50.41 U2.29_7 14.62,50.41 14.62,51.59 U2.29_8 14.62,51.66 14.62,52.84 U2.29_9 14.55,52.91 13.38,52.91 U2.29_6 13.31,52.91 12.13,52.91 U2.29_3 12.06,52.91 10.95,52.91 7.7,56.16 7.7,61.84 U2.28 7.63,61.91 6.66,62.88 | U2.1 7.7,44.46 7.7,45.98 12.06,50.34 U2.29_1 | 14.97,77.91 14.9,77.91 8.74,77.91 6.87,76.04 6.87,63.16 6.66,62.95 6.66,62.88 | C6.2 67.39,107.82 65.87,107.82 65.8,107.89 BOOT_BUTTON.2 65.73,107.96 62.27,107.96 BOOT_BUTTON.1 62.2,107.96 61.57,107.96 61.16,108.38 52.99,108.38 52.5,107.89 C5.2 52.43,107.89 50.77,107.89 RESET_BUTTON.2 50.7,107.96 47.31,107.96 RESET_BUTTON.1 47.24,107.96 46.76,108.44 45.09,108.44 44.95,108.31 44.95,107.82 | 44.95,107.82 44.95,103.25 46.96,101.24 47.03,101.24 47.45,100.83 IC1.3 47.45,100.9 v48.35,100.9 | v49.39,101.38 52.02,101.38 C_DELAY.2 52.09,101.38 64.34,89.12 82.21,89.12 | 82.21,89.12 83.53,89.12 TP5.TP | 44.95,107.82 44.89,107.82 27.43,107.82 C10.2 27.37,107.82 25.84,107.82 25.77,107.89 CHANGE_BUTTON.2 25.7,107.96 22.31,107.96 CHANGE_BUTTON.1 22.24,107.89 22.24,102.28 9.5,89.54 8.46,89.54 7.77,88.85 7.7,88.85
  Top 0.15: 159.01,8.45 158.32,8.45 157.9,8.86 157.9,9.14 SENSOR2.7 157.83,9.21 157.83,9.42 157.07,10.18 157.07,12.05 SENSOR2.1 | 159.01,8.45 159.42,8.86 159.42,9.14 SENSOR2.5 159.49,9.21 164.96,14.68 164.96,17.66 J3.1 165.03,17.73 165.31,17.73 165.93,18.35 165.93,49.24 165.93,49.31 | 159.01,8.45 159.01,8.38 159.01,5.26 C1.2 158.8,5.19 160.05,5.19 C2.2 160.12,5.12 160.19,5.05 168.15,5.05 TP4.TP | U4.9 133.46,52.98 133.46,52.84 132.9,52.28 132.56,52.28 U4.4 132.49,52.22 132.49,50.69 130.69,48.89 124.59,48.89 124.52,48.89 | U4.9 133.53,52.84 134.43,52.84 U4.6 134.49,52.77 147.31,52.77 150.7,56.16 156.93,56.16 v157,56.16 157.07,56.23 157.11,56.27 | U4.1 132.56,53.74 132.9,53.74 133.46,53.18 133.46,53.05 U4.9 | 124.52,48.89 124.52,49.38 123.97,49.93 123.69,49.93 MCP73831.2 123.62,49.93 122.86,49.93 | 124.52,48.89 124.52,48.68 121.61,45.77 121.13,45.77 R2_BAT.1 121.06,45.7 v121.06,43 | 122.86,49.93 120.78,49.93 120.23,49.38 120.23,48.82 119.88,48.48 118.98,48.48 118.36,49.1 118.15,49.1 C1_BAT.2 | C2_BAT.2 127.78,54.02 125.56,54.02 122.86,51.31 122.86,50 122.86,49.93 | J2.B12 164,51.31 164,51.11 J2.A1 164,51.04 164,50.9 | 164,50.9 164,49.79 164.48,49.31 J2.MP3 164.62,49.31 165.93,49.31 | 165.93,49.31 168.43,49.31 J2.MP1 | C4_USB.2 154.51,49.31 154.51,50.41 C5_USB.2 154.44,50.48 153.12,50.48 151.11,52.49 150.63,52.49 R2-USB1.1 150.56,52.56 149.87,53.25 149.87,54.22 150.08,54.43 151.11,54.43 152.36,53.18 153.33,53.18 D1.2 153.4,53.18 154.02,53.18 v154.37,53.53 | 157.11,56.27 157.07,56.3 157.07,57.2 157.28,57.41 163.93,57.41 J2.B1 164,57.48 164,57.69 J2.A12 164,57.76 164.48,58.24
  Top 0.15: 157.11,56.27 157.69,55.68 157.69,55.54 R2-USB.2 | 164.48,58.24 164.48,59.49 J2.MP4 164.55,59.55 168.43,59.55 J2.MP2 | 164,50.9 164.06,50.9 165.31,50.9 165.66,51.24 165.66,57.55 164.96,58.24 164.55,58.24 164.48,58.24 | EPD_C9.2 80,25 EPD_C10.2 | EPD_C10.2 79.93,25.07 78.26,25.07 EPD_C11.2 78.19,25.07 76.46,25.07 EPD_C12.2 76.46,25.14 76.46,25.55 74.46,27.56 74.46,28.67 73.97,29.15 73.42,29.15 73.35,29.15 | J1.8 85.19,15.03 85.19,15.37 84.91,15.65 80.96,15.65 80.76,15.44 80.76,15.03 J1.17 80.69,14.96 80.69,14.61 80.41,14.34 76.95,14.34 71.27,20.01 70.37,20.01 EPD_C2.2 | EPD_C1.2 69.12,20.01 70.3,20.01 EPD_C2.2 | 73.35,29.15 73.35,30.12 C7.2 | 73.35,29.15 72.31,28.12 D6.1 72.24,28.05 70.3,26.11 70.3,20.08 EPD_C2.2 | R4.2 64.9,13.85 64.69,13.85 63.93,13.09 62.68,13.09 62.27,12.67 62.27,10.94 62.48,10.73 63.86,10.73 64.76,11.63 SJ1.1 64.69,11.77 64.76,11.7 67.11,11.7 67.88,12.46 76.19,12.46 J1.MP2 76.26,12.46 76.74,12.46 77.92,11.29 88.37,11.29 89.62,12.53 J1.MP1 89.69,12.53 89.69,24.03 88.72,25 EPD_C5.2 | EPD_C8.2 83.39,25 84.98,25 EPD_C7.2 EPD_C6.2 86.99,25 88.65,25 EPD_C5.2 | 88.51,31.23 88.51,25.07 EPD_C5.2 | 88.51,31.23 88.51,36.01 88.37,36.15 87.13,36.15 86.92,35.94 86.92,34 80.13,27.21 80.13,25.07 EPD_C10.2 | 42.32,36.08 44.19,36.08 D11.1 44.26,36.08 45.85,36.08 D12.1 45.92,36.01 71.13,36.01 72.38,34.76 72.45,34.76 | 42.32,36.08 41.49,36.08 D10.1 | D9.1 34.15,47.16 33.87,47.44 33.87,51.04 U1.4 33.94,51.04 35.81,51.04 37.68,52.91 U1.9 37.75,52.91 41.98,52.91 42.32,52.56 42.32,36.15 42.32,36.08 | 121.06,40.23 122.79,40.23 125.28,37.74 C3.- 125.35,37.74 127.02,39.4 128.89,39.4 C1_BAT2.2
  Top 0.15: 121.06,40.23 119.88,40.23 | 119.88,40.23 119.26,40.23 IC4.2 | 119.88,40.23 119.88,40.16 119.88,38.92 117.67,36.7 115.94,36.7 115.24,37.4 115.11,37.4 C1_BAT1.2 115.04,37.46 115.04,39.2 114.27,39.96 R1_PWRUSB.1 114.2,40.03 110.74,40.03 95.72,55.05 95.65,55.05 C10_SUPERCAP.1 95.51,54.98 95.02,54.5 92.32,54.5 C8.2 92.25,54.5 92.04,54.71 86.23,54.71 85.33,53.81 85.33,53.46 U3.13 85.26,53.39 85.26,51.8 84.29,50.83 84.29,49.24 | 72.45,34.76 72.45,31.16 71.69,30.4 71.69,30.19 R2.1 | 72.45,34.76 77.78,40.1 81.38,40.1 | 81.38,40.1 81.93,39.54 D3.1 | 84.29,43.07 84.29,49.24 | 84.29,43.07 81.38,40.16 81.38,40.1 | 88.51,31.23 88.58,31.23 91.84,31.23 93.85,33.24 93.85,37.4 88.17,43.07 84.36,43.07 84.29,43.07 | v121.06,40.3 121.06,40.23 | 82.21,89.12 82.21,89.06 82.21,50.28 83.25,49.24 84.22,49.24 84.29,49.24
  Bottom 0.15: v49.39,101.38 48.83,101.38 v48.35,100.9 | v157,56.16 v154.37,53.53 | v121.06,40.3 v121.06,43
  pour Top: -7.41,-6.32 191.84,-6.32 191.84,132.52 -7.41,132.52
  pour Bottom: -7.51,-6.92 192.74,-6.92 192.74,132.82 -7.51,132.82
GPIO8
  Top 0.15: R1.2 19.26,41.62 19.26,44.25 19.12,44.39 U2.10
I2C_PW  (via drill 0.3)
  Top 0.15: C2.1 158.8,3.88 C1.1 158.73,3.95 158.73,4.09 157.62,5.19 R2_PINH.2 157.56,5.26 157.07,5.26 | 157.07,5.26 156.38,5.26 R1_PINH.2 | 157.07,5.26 157.07,5.33 157.07,9.14 SENSOR2.8 157,9.21 157,9.83 156.59,10.25 156.59,12.67 156.72,12.81 157.35,12.81 157.83,12.33 157.83,12.12 SENSOR2.2 157.9,12.05 157.9,11.15 | 157.9,11.15 157.9,10.18 158.59,9.49 158.59,9.21 SENSOR2.6 | v27.23,56.02 21.69,61.56 21.69,61.84 U2.17 | v157.83,11.15 157.9,11.15
  Bottom 0.15: v27.23,56.02 86.16,56.02 131.03,11.15 v157.83,11.15
INT_RTC  (via drill 0.3)
  Top 0.15: v31.8,59.9 16.56,44.67 16.56,44.46 U2.8 | v84.64,59.9 84.64,60.11 86.5,61.98 86.5,62.74 U3.3 86.57,62.81 87.34,63.57 87.34,65.16 R1_PINH1.1 87.41,65.23 87.68,65.51 87.68,67.52 86.78,68.42 86.78,89.06 TP15.TP
  Bottom 0.15: v84.64,59.9 v31.8,59.9
IO/BOOT  (via drill 0.3)
  Top 0.15: C6.1 67.39,109.14 66.08,109.14 65.8,109.42 BOOT_BUTTON.3 65.73,109.42 62.27,109.42 BOOT_BUTTON.4 62.2,109.42 61.92,109.14 60.61,109.14 R_BOOT.2 60.54,109.07 60.33,108.86 v59.71,108.86 | v24.18,73.34 24.18,61.91 U2.15
  Bottom 0.15: v59.71,108.86 v24.18,73.34
IO/CHANGE  (via drill 0.3)
  Top 0.15: C10.1 27.37,109.14 26.05,109.14 25.77,109.42 CHANGE_BUTTON.3 25.7,109.42 22.31,109.42 CHANGE_BUTTON.4 22.24,109.42 21.96,109.14 20.72,109.14 R_CHANGE.2 20.65,109.07 v14.07,102.49 | v14.07,63.36 14.07,61.91 U2.23
  Bottom 0.15: v14.07,102.49 v14.07,63.36
MISO  (via drill 0.3)
  Top 0.15: v46.41,32.62 45.65,32.62 R8.1 | v46.41,33.66 46.41,34 45.92,34.49 D12.2 | 31.83,51.35 31.8,51.31 v31.8,46.74 | 31.83,51.35 33.81,53.32 33.81,53.53 U1.2 | v8.88,77.42 8.88,61.91 U2.27 | J4.P7 5.34,82.48 4.93,82.06 v4.24,82.06 4.37,82.13 4.37,84 5.41,85.04 5.41,98.27 TP6.TP | v31.8,51.38 31.83,51.35
  Bottom 0.15: v46.41,32.62 v46.41,33.66 46.34,33.66 33.25,46.74 v31.8,46.74 | v4.24,82.06 v8.88,77.42 8.88,77.35 8.88,66.48 23.97,51.38 v31.8,51.38
MOSI  (via drill 0.3)
  Top 0.15: v82.07,14.2 82.14,14.27 82.14,14.96 J1.14 | v44.75,31.86 44.05,32.55 R7.1 | v41.63,36.91 41.63,51.04 U1.5 | v43.36,33.66 44.19,34.49 D11.2 | v17.6,41.83 15.32,44.11 15.32,44.39 U2.7 | v4.65,77.35 5.34,78.05 J4.P3 | v9.78,38.57 2.5,31.3 TP7.TP
  Bottom 0.15: v82.07,14.2 81.86,14.2 76.81,19.25 71.48,19.25 69.68,17.45 59.15,17.45 v44.75,31.86 44.75,31.92 43.19,33.48 | 43.19,33.48 41.63,35.04 v41.63,36.91 41.56,36.91 23.9,36.91 22.38,38.43 22.38,39.96 20.51,41.83 v17.6,41.83 17.6,41.9 16.56,42.94 | v43.36,33.66 43.22,33.52 43.19,33.48 | v4.65,77.35 4.65,65.03 16.56,53.12 16.56,42.94 | v9.78,38.57 14.14,42.94 16.49,42.94 16.56,42.94
N$1
  Top 0.15: R2-USB1.2 150.63,53.81 150.63,53.6 151.88,52.35 151.88,52.15 152.36,51.66 160.53,51.66 161.99,53.12 163.93,53.12 J2.A5
N$2
  Top 0.15: R2-USB.1 157.76,56.72 162.89,56.72 163.44,56.16 163.93,56.16 J2.B5
N$3
  Top 0.15: C1_BAT1.1 116.35,37.46 116.35,39.4 D2.1 116.42,39.33 118.57,39.33 | 118.57,39.33 119.19,39.33 IC4.3 | 118.57,39.33 118.57,39.4 118.57,40.72 119.05,41.2 119.19,41.2 IC4.1 119.26,41.27 119.95,41.97 124.87,41.97 130.34,47.44 131.1,47.44 Q1.2
N$5
  Top 0.15: R1_BAT.1 114.27,50.83 114.41,50.83 118.78,46.47 121.61,46.47 123.62,48.48 123.62,49.03 MCP73831.1
N$6
  Top 0.15: C4.1 93.15,36.91 92.67,36.91 91.28,35.52 D4.1 91.21,35.52 89.21,37.53 82.63,37.53 80.69,39.47 78.54,39.47 D3.2
N$7
  Top 0.15: CHG_LED.C 118.08,50.9 115.59,50.9 R1_BAT.2
N$8
  Top 0.15: R2_BAT.2 121.13,47.09 121.13,49.03 MCP73831.5
N$10
  Top 0.15: J1.5 86.64,14.96 86.64,14.54 84.22,12.12 78.33,12.12 71.75,18.7 70.37,18.7 EPD_C2.1
N$11  (via drill 0.3)
  Top 0.15: v83.25,19.32 87.2,15.37 87.2,15.03 J1.4 | v71.13,19.53 70.99,19.53 70.78,19.32 69.68,19.32 69.12,18.77 EPD_C1.1
  Bottom 0.15: v83.25,19.32 77.16,19.32 76.95,19.53 v71.13,19.53
N$12
  Top 0.15: IC1.5 50.29,102.7 52.02,102.7 C_DELAY.1
N$14
  Top 0.15: R_CAPACITOR.2 83.67,50 83.67,52.22 83.53,52.35 83.53,59.42 86.02,61.91 86.02,66 86.99,66.97 D7.1
N$20
  Top 0.15: J1.24 77.16,15.03 77.16,22.99 76.46,23.68 EPD_C12.1
N$22
  Top 0.15: J1.22 78.26,15.03 78.26,22.02 79.93,23.68 EPD_C10.1
N$23
  Top 0.15: J1.20 79.23,15.03 79.23,19.6 83.32,23.68 EPD_C8.1
N$25
  Top 0.15: J1.18 80.2,15.03 80.2,16.97 86.92,23.68 EPD_C6.1
N$26
  Top 0.15: J1.19 79.72,15.03 79.72,18.42 84.98,23.68 EPD_C7.1
PREVGH
  Top 0.15: J1.21 78.75,15.03 78.75,20.77 81.66,23.68 EPD_C9.1 81.73,23.75 82.35,24.38 82.35,25.14 87.61,30.4 87.61,31.86 D5.1
PREVGL  (via drill 0.3)
  Top 0.15: J1.23 77.71,15.03 77.71,23.27 78.19,23.75 EPD_C11.1 78.26,23.82 78.75,24.31 v79.03,24.31 | v80.62,25.9 80.62,26.11 87.68,33.17 87.68,35.46 D4.2
  Bottom 0.15: v79.03,24.31 v80.62,25.9
RESE
  Top 0.15: 67.88,13.64 76.39,13.64 78.19,11.84 84.91,11.84 87.68,14.61 87.68,14.96 J1.3 | 67.88,13.64 66.56,12.33 R3.1 | Q3.2 66.91,16.2 66.91,14.68 67.88,13.71 67.88,13.64
RESE'
  Top 0.15: SJ1.2 63.17,11.84 63.17,12.05 63.93,12.81 64.97,12.81 65.66,13.5 66.49,13.5 R3.2 66.21,13.57 66.21,16.69 65.8,17.11 65.8,25.41 71.62,31.23 71.62,31.44 R2.2
RESET  (via drill 0.3)
  Top 0.15: C5.1 52.43,109.21 50.98,109.21 50.77,109.42 RESET_BUTTON.3 50.7,109.42 49.39,109.42 48.42,108.44 v48.35,108.44 47.31,109.48 RESET_BUTTON.4 47.24,109.42 47.03,109.21 45.65,109.21 R_RESET.2 | v47.52,106.58 47.52,102.77 IC1.1 | v15.25,60.73 15.25,49.86 10.26,44.87 10.26,44.46 U2.3
  Bottom 0.15: v48.35,108.44 47.52,107.61 v47.52,106.58 47.52,106.51 47.52,106.23 15.25,73.96 v15.25,60.73
RTC_RST  (via drill 0.3)
  Top 0.15: v46.55,60.87 23.69,60.87 22.93,61.63 22.93,61.84 U2.16 | v83.73,60.87 85.26,62.39 85.26,62.74 U3.4
  Bottom 0.15: v83.73,60.87 v46.55,60.87
RX
  Top 0.15: U2.24 12.75,61.91 12.75,63.71 13.79,64.75 TP2.TP
SCK  (via drill 0.3)
  Top 0.15: v82.7,14.2 82.7,14.96 J1.13 | 42.25,33.17 v71.48,33.17 | 42.25,33.17 41.7,32.62 R6.1 | J4.P5 5.34,80.26 4.79,80.26 2.71,78.18 2.71,66.62 2.23,66.13 TP8.TP 2.71,66.55 v4.17,65.09 | 40.73,40.86 40.73,35.25 41.42,34.56 D10.2 41.49,34.49 42.25,33.73 42.25,33.24 42.25,33.17 | 40.73,40.86 40.73,51.18 41.56,52.01 41.56,52.28 U1.6 | 40.73,40.86 40.66,40.86 17.25,40.86 14.07,44.04 14.07,44.39 U2.6 14,44.46 14,44.67 v13.17,45.5
  Bottom 0.15: v82.7,14.2 82.7,18.14 83.73,19.18 83.73,19.46 79.37,23.82 78.89,23.82 77.36,25.35 77.36,27.29 v71.48,33.17 | v4.17,65.09 13.17,56.09 v13.17,45.5
SCL  (via drill 0.3)
  Top 0.15: 158.04,13.78 156.86,13.78 155.41,12.33 155.41,3.74 155.82,3.32 156.86,3.32 157.42,3.88 157.56,3.88 R2_PINH.1 | 158.04,13.78 159.42,12.4 159.42,12.12 SENSOR2.4 | v163.3,19.32 164.62,20.64 164.96,20.64 J3.4 | v158.04,14.06 158.04,13.85 158.04,13.78 | v135.26,53.25 134.49,53.25 U4.7 | v96.89,53.25 96.27,53.88 91.21,53.88 91.01,54.08 90.8,54.08 | 90.8,54.08 89.76,54.08 89.14,53.46 U3.16 | v22.45,56.99 17.88,61.56 17.88,61.84 U2.20 | v90.8,54.22 90.8,54.15 90.8,54.08
  Bottom 0.15: v158.04,14.06 v163.3,19.32 163.3,19.39 163.3,25.14 135.26,53.18 v135.26,53.25 v96.89,53.25 | v22.45,56.99 88.03,56.99 v90.8,54.22
SDA  (via drill 0.3)
  Top 0.15: 157.9,13.09 156.59,13.09 155.69,12.19 155.69,4.78 156.31,4.16 156.31,3.95 R1_PINH.1 | 157.9,13.09 158.59,12.4 158.59,12.12 SENSOR2.3 | v163.93,19.32 164.27,19.67 164.96,19.67 J3.3 | v157.9,13.3 157.9,13.16 157.9,13.09 | v133.73,54.22 134.15,53.81 134.43,53.81 U4.8 | v90.87,53.6 89,51.73 88.37,51.73 87.89,52.22 87.89,53.39 U3.15 | v24.18,56.51 19.12,61.56 19.12,61.84 U2.19
  Bottom 0.15: v157.9,13.3 v163.93,19.32 163.93,19.39 163.93,41.34 151.39,53.88 135.67,53.88 135.33,54.22 133.8,54.22 v133.73,54.22 91.49,54.22 v90.87,53.6 90.8,53.6 87.89,56.51 v24.18,56.51
SRC
  Top 0.15: 92.15,32.86 91.21,31.92 D5.2 | 92.15,32.86 93.15,33.86 93.15,35.59 C4.2 | Q3.3 66.28,18.35 66.28,23.68 72.72,30.12 72.72,31.92 77.57,36.77 80.13,36.77 L1.1 80.2,36.77 88.24,36.77 92.11,32.89 92.15,32.86
SS_SD  (via drill 0.3)
  Top 0.15: D8.2 12.89,87.6 11.65,88.85 9.01,88.85 R10.1 9.01,88.78 v9.01,88.16 | v15.73,59 15.73,49.93 11.51,45.7 11.51,44.46 U2.4 | v6.38,68.35 6.38,76.45 5.83,77.01 J4.P2
  Bottom 0.15: v15.73,59 v6.38,68.35 6.38,68.42 6.38,76.24 3.75,78.88 3.75,82.2 9.01,87.46 v9.01,88.16
TX
  Top 0.15: U2.25 11.44,61.91 11.44,64.61 11.37,64.68 TP1.TP
USB_D+  (via drill 0.3)
  Top 0.15: v152.02,54.15 153.33,54.15 D1.1 | v93.08,55.05 85.33,55.05 84.57,54.29 84.57,52.35 v84.15,51.94 | v40.25,51.24 40.25,50.41 34.29,44.46 24.18,44.46 U2.14
  Bottom 0.15: v152.02,54.15 135.81,54.15 134.91,55.05 v93.08,55.05 | v84.15,51.94 40.94,51.94 v40.25,51.24
USB_D-  (via drill 0.3)
  Top 0.15: v152.36,52.28 153.33,52.28 D1.3 | v90.73,52.15 90.52,52.15 89.14,50.76 v85.54,50.76 | v23.76,45.5 22.93,44.67 22.93,44.46 U2.13
  Bottom 0.15: v152.36,52.28 136.85,52.28 135.4,53.74 92.32,53.74 v90.73,52.15 | v85.54,50.76 29.03,50.76 v23.76,45.5
VBAT
  Top 0.3: U4.2 132.56,53.25 132.56,52.84 U4.3 132.35,52.77 132,52.77 | 127.85,51.87 127.85,52.77 C2_BAT.1 | 129.47,50.24 130.13,49.58 Q1.3 | 129.47,50.24 127.85,51.87 | 132,52.77 129.58,50.34 129.47,50.24 | MCP73831.3 123.69,50.97 126.88,50.97 127.71,51.8 127.85,51.87 | TP3.TP 130.96,64.47 130.96,53.88 131.93,52.91 132,52.77
VBUS
  Top 0.3: CHG_LED.A 119.61,50.9 121.06,50.9 MCP73831.4 121.2,51.04 128.19,58.03 128.19,64.33 TP14.TP | C1_BAT.1 119.47,49.17 119.47,50.83 CHG_LED.A | C5_USB.1 155.82,50.41 155.82,49.31 C4_USB.1 155.69,49.17 155.13,48.61 155.06,48.61 153.05,46.6 151.53,46.6 PFMF.050.1.2 151.39,46.54 149.45,48.48 | 149.45,48.48 149.45,54.36 149.94,54.85 153.95,54.85 154.3,54.5 154.3,54.36 155.48,53.18 155.82,53.18 D1.5 | 149.45,48.48 149.31,48.41 130.13,48.41 129.3,47.58 Q1.1 129.16,47.44 126.25,47.44 121.2,42.38 117.32,42.38 116.49,41.55 D2.2 116.35,41.48 116.21,41.34 114.27,41.34 R1_PWRUSB.2 114.2,41.48 113.58,42.1 113.58,51.38 113.79,51.59 118.64,51.59 119.33,50.9 CHG_LED.A
VRTC
  Top 0.3: C10_SUPERCAP.2 95.51,52.91 95.3,53.12 92.32,53.12 C8.1 92.18,53.05 90.87,53.05 89.14,51.31 87.75,51.31 86.64,52.42 U3.14 86.5,53.39 86.5,52.49 84.98,50.97 84.98,50 R_CAPACITOR.1
VUSB
  Top 0.3: J2.A9 164,56.92 164,56.72 J2.B4 164.13,56.65 164.62,56.65 165.17,56.09 165.17,52.7 164.69,52.22 164.13,52.22 J2.B9 164,52.15 164,51.87 J2.A4 163.86,51.8 161.23,51.8 155.96,46.54 PFMF.050.1.1

## Text on the board
tPlace: MISO | GND | INT_RTC | 3V3 | EPD_RST | EPD_3V3_C | SCK | TX | RX | VBUS | VBAT | EPD_DC | EPD_BUSY | MOSI | GND | EPD_CS | EPD_3V3